# Altium PCB Example.PcbDoc
Units mil, origin at the board's own origin, x right, y up, seen from the top; angles counter-clockwise.
Board outline 7086.61 x 5787.4 mil, 2 copper layers (Top Layer, Bottom Layer); 73 components, 41 nets, 136 pads, 0 vias.
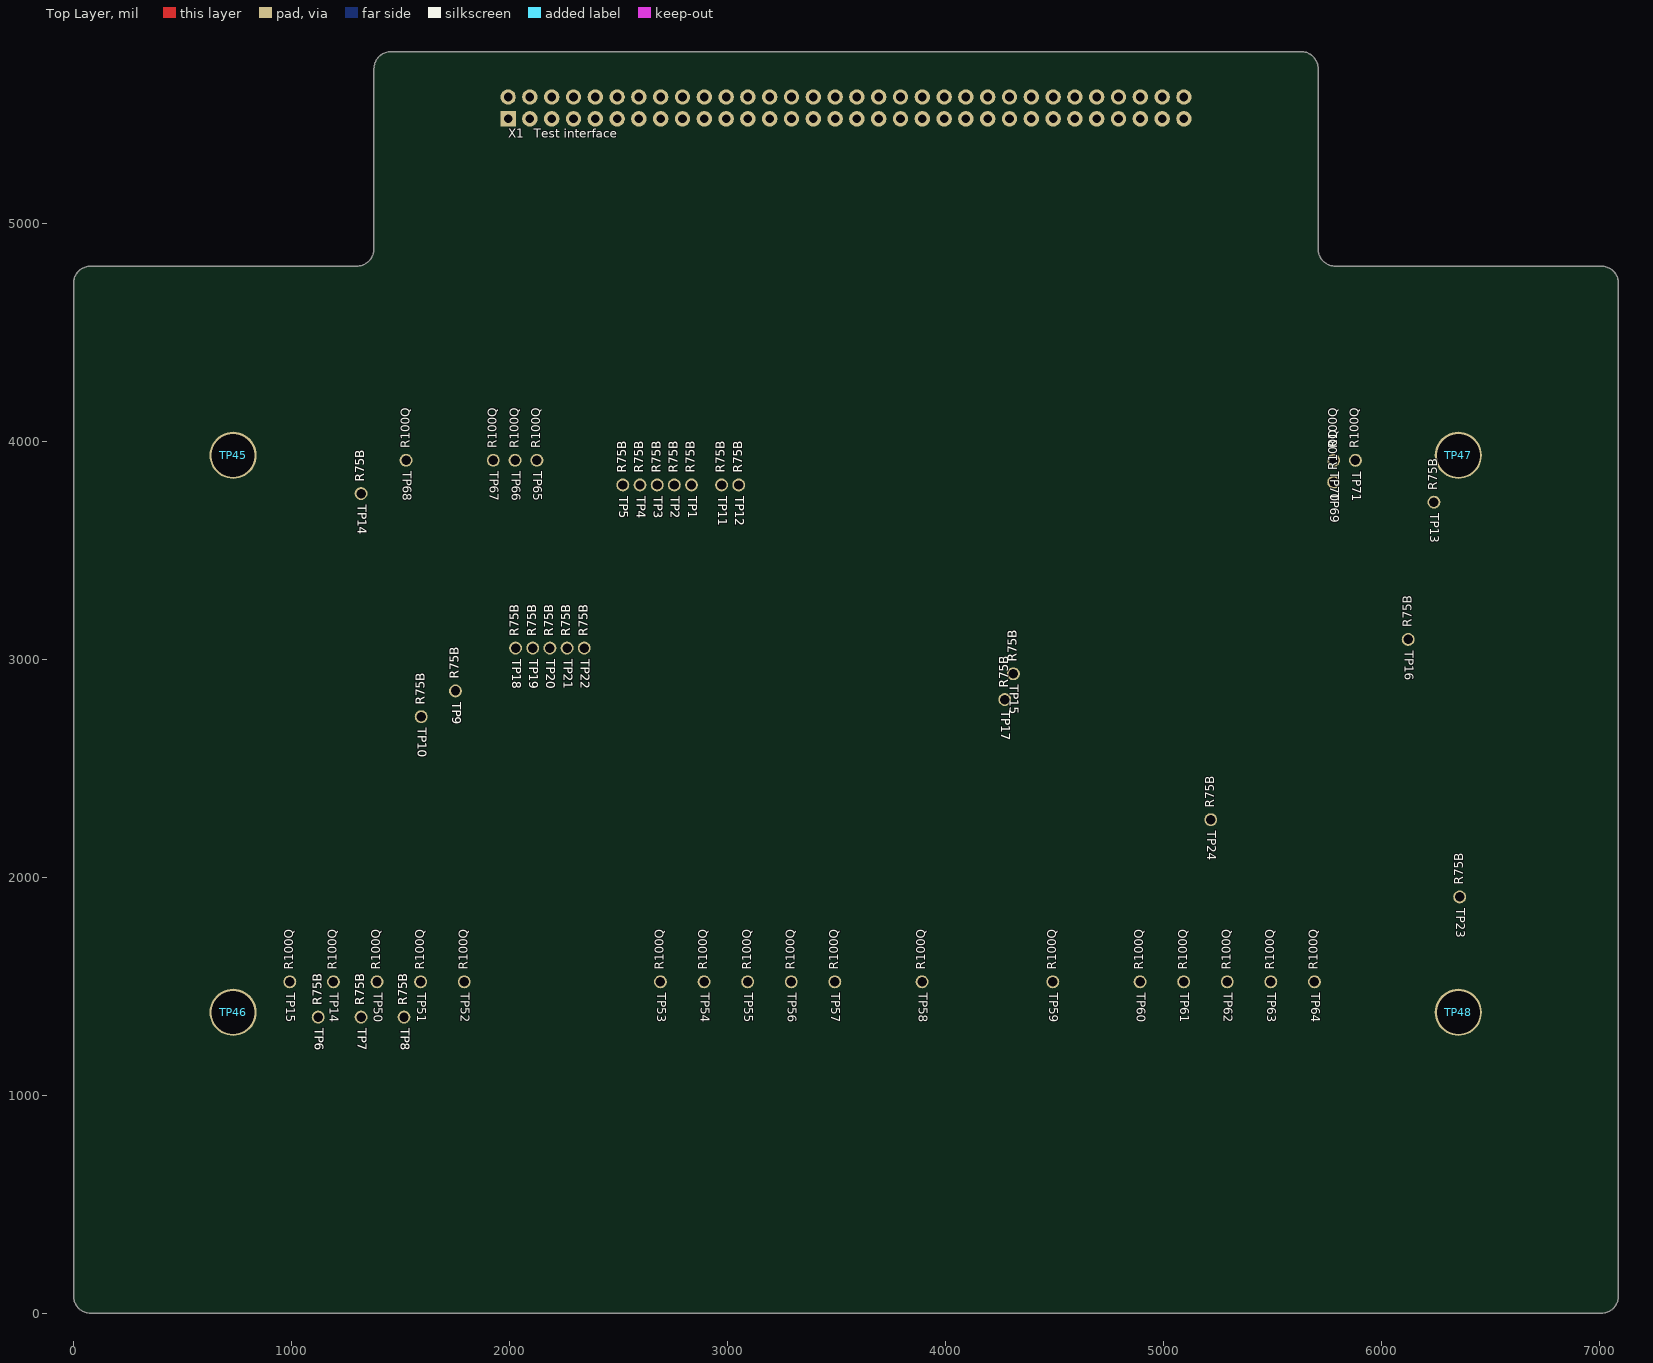
[diagram p0: Top Layer view]
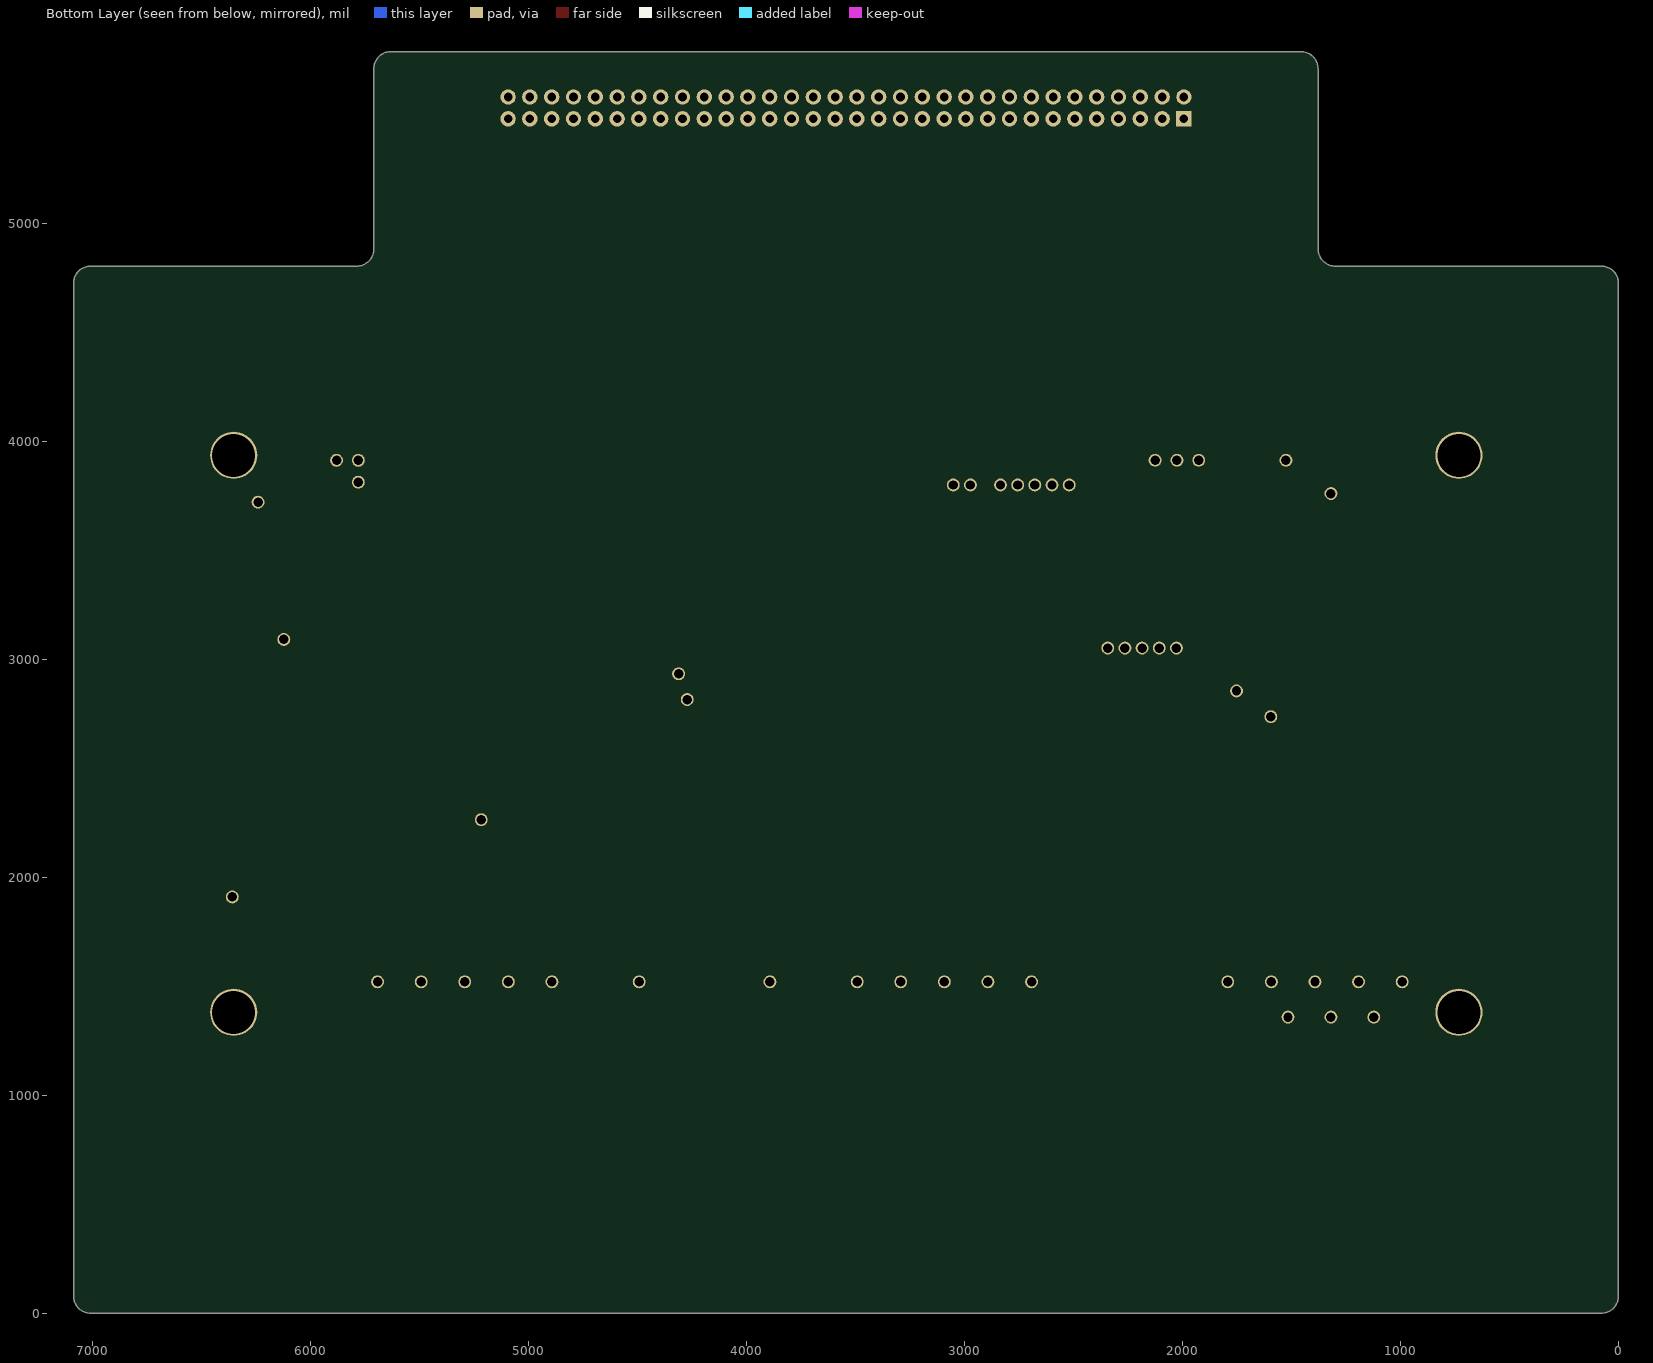
[diagram p1: Bottom Layer view, seen from below]

## Layer stack, top to bottom
Top Solder: solder mask 0.4, Solder Resist, Dk 3.5
Top Layer: signal copper 1.4
Dielectric 1: dielectric 12.6, FR-4, Dk 4.8
Bottom Layer: signal copper 1.4
Bottom Solder: solder mask 0.4, Solder Resist, Dk 3.5

## Board outline
78.74,0 cw(c78.74,78.74) 0,78.74 0,4724.41 cw(c78.74,4724.41) 78.74,4803.15 1299.21,4803.15 ccw(c1299.21,4881.89) 1377.95,4881.89 1377.95,5708.66 cw(c1456.69,5708.66) 1456.69,5787.4 5629.92,5787.4 cw(c5629.92,5708.66) 5708.66,5708.66 5708.66,4881.89 ccw(c5787.4,4881.89) 5787.4,4803.15 7007.87,4803.15 cw(c7007.87,4724.41) 7086.61,4724.41 7086.61,78.74 cw(c7007.87,78.74) 7007.87,0

## Design rules (kind name [scope] priority, off if disabled: settings)
Clearance [All] p1: gap=10 ignorepadtopadclearanceinfootprint=FALSE except(0: Arc-Hole Track-Hole SMDPad-Hole THPad-Hole Via-Hole Fill-Hole Poly-Hole Region-Hole Text-Hole)
PolygonConnect [All] p1: connectstyle=Relief reliefconductorwidth=10 reliefentries=4 polygonreliefangle="90 Angle" airgapwidth=10
RoutingVias [All] p1: holewidth=28 width=50 viastyle="Through Hole" minholewidth=28 minwidth=50 maxholewidth=28 maxwidth=50
SolderMaskExpansion [All] p1: expansion=4 istentingtop=FALSE
Width [All] p1: maxlimit=10 minlimit=10 preferedwidth=10
30 further rules are at their usual default settings.

## Components (designator, comment, footprint, x,y, rotation, side; value= is the part's Value field where it differs from the comment)
TP1 "R75B" ?#1 2834.65,3799.21 r0 top
TP1 "R75B" ?#1 2834.65,3799.21 r0 top
TP2 "R75B" ?#1 2755.91,3799.21 r0 top
TP2 "R75B" ?#1 2755.91,3799.21 r0 top
TP3 "R75B" ?#1 2677.17,3799.21 r0 top
TP3 "R75B" ?#1 2677.17,3799.21 r0 top
TP4 "R75B" ?#1 2598.43,3799.21 r0 top
TP4 "R75B" ?#1 2598.43,3799.21 r0 top
TP5 "R75B" ?#1 2519.68,3799.21 r0 top
TP5 "R75B" ?#1 2519.68,3799.21 r0 top
TP6 "R75B" ?#1 1122.05,1358.27 r0 top
TP6 "R75B" ?#1 1122.05,1358.27 r0 top
TP7 "R75B" ?#1 1318.9,1358.27 r0 top
TP7 "R75B" ?#1 1318.9,1358.27 r0 top
TP8 "R75B" ?#1 1515.75,1358.27 r0 top
TP8 "R75B" ?#1 1515.75,1358.27 r0 top
TP9 "R75B" ?#1 1751.97,2854.33 r0 top
TP9 "R75B" ?#1 1751.97,2854.33 r0 top
TP10 "R75B" ?#1 1594.49,2736.22 r0 top
TP10 "R75B" ?#1 1594.49,2736.22 r0 top
TP11 "R75B" ?#1 2972.44,3799.21 r0 top
TP11 "R75B" ?#1 2972.44,3799.21 r0 top
TP12 "R75B" ?#1 3051.18,3799.21 r0 top
TP12 "R75B" ?#1 3051.18,3799.21 r0 top
TP13 "R75B" ?#1 6240.16,3720.47 r0 top
TP14 "R100Q" ?#1 1192.13,1520.16 r0 top
TP14 "R75B" ?#1 1318.9,3759.84 r0 top
TP14 "R75B" ?#1 1318.9,3759.84 r0 top
TP15 "R100Q" ?#1 992.13,1520.16 r0 top
TP15 "R75B" ?#1 4311.02,2933.07 r0 top
TP15 "R75B" ?#1 4311.02,2933.07 r0 top
TP16 "R75B" ?#1 6122.05,3090.55 r0 top
TP17 "R75B" ?#1 4271.65,2814.96 r0 top
TP17 "R75E" ?#1 4271.65,2814.96 r0 top
TP18 "R75B" ?#1 2027.56,3051.18 r0 top
TP18 "R75B" ?#1 2027.56,3051.18 r0 top
TP19 "R75B" ?#1 2106.3,3051.18 r0 top
TP19 "R75B" ?#1 2106.3,3051.18 r0 top
TP20 "R75B" ?#1 2185.04,3051.18 r0 top
TP20 "R75B" ?#1 2185.04,3051.18 r0 top
TP21 "R75B" ?#1 2263.78,3051.18 r0 top
TP21 "R75B" ?#1 2263.78,3051.18 r0 top
TP22 "R75B" ?#1 2342.52,3051.18 r0 top
TP22 "R75B" ?#1 2342.52,3051.18 r0 top
TP23 "R75B" ?#1 6358.27,1909.45 r0 top
TP24 "R75B" ?#1 5216.54,2263.78 r0 top
TP45 "" ?#2 732.13,3935.15 r0 top
TP46 "" ?#2 732.13,1380.15 r0 top
TP47 "" ?#2 6352.13,3935.15 r0 top
TP48 "" ?#2 6352.13,1380.15 r0 top
TP50 "R100Q" ?#1 1392.13,1520.16 r0 top
TP51 "R100Q" ?#1 1592.13,1520.16 r0 top
TP52 "R100Q" ?#1 1792.13,1520.16 r0 top
TP53 "R100Q" ?#1 2692.13,1520.16 r0 top
TP54 "R100Q" ?#1 2892.13,1520.16 r0 top
TP55 "R100Q" ?#1 3092.13,1520.16 r0 top
TP56 "R100Q" ?#1 3292.13,1520.16 r0 top
TP57 "R100Q" ?#1 3492.13,1520.16 r0 top
TP58 "R100Q" ?#1 3892.13,1520.16 r0 top
TP59 "R100Q" ?#1 4492.13,1520.16 r0 top
TP60 "R100Q" ?#1 4892.13,1520.16 r0 top
TP61 "R100Q" ?#1 5092.13,1520.16 r0 top
TP62 "R100Q" ?#1 5292.13,1520.16 r0 top
TP63 "R100Q" ?#1 5492.13,1520.16 r0 top
TP64 "R100Q" ?#1 5692.13,1520.16 r0 top
TP65 "R100Q" ?#1 2125.39,3912.48 r0 top
TP66 "R100Q" ?#1 2025.39,3912.48 r0 top
TP67 "R100Q" ?#1 1925.39,3912.48 r0 top
TP68 "R100Q" ?#1 1525.39,3912.48 r0 top
TP69 "R100Q" ?#1 5780.12,3812.17 r0 top
TP70 "R100Q" ?#1 5780.12,3912.17 r0 top
TP71 "R100Q" ?#1 5880.12,3912.17 r0 top
X1 "Test interface" ?#3 1993.31,5478.74 r0 top

## Footprints (in the part's own frame and the unit in brackets; to place one, negate y for a bottom-side part, rotate by r counter-clockwise, add the part's x,y. Pads: shape width x height; smd on the part's side, far side on the other; paste and mask are expansions set on the pad)
?#1 [mm]
  round 1.5 hole 1.1 paste+0 mask+0.01: 1(0,0)
?#2 [mm]
  round 5.5 hole 5 paste+0 mask+0.01: 0(0,0)
?#3 [mm]
  rect 1.8x1.8 hole 1 paste+0 mask+0.01: 1(0,0)
  round 1.8 hole 1 paste+0 mask+0.01: 2(0,2.54) 3(2.54,0) 4(2.54,2.54) 5(5.08,0) 6(5.08,2.54) 7(7.62,0) 8(7.62,2.54) 9(10.16,0) 10(10.16,2.54) 11(12.7,0) 12(12.7,2.54) 13(15.24,0) 14(15.24,2.54) 15(17.78,0) 16(17.78,2.54) 17(20.32,0) 18(20.32,2.54) 19(22.86,0) 20(22.86,2.54) 21(25.4,0) 22(25.4,2.54) 23(27.94,0) 24(27.94,2.54) 25(30.48,0) 26(30.48,2.54) 27(33.02,0) 28(33.02,2.54) 29(35.56,0) 30(35.56,2.54) 31(38.1,0) 32(38.1,2.54) 33(40.64,0) 34(40.64,2.54) 35(43.18,0) 36(43.18,2.54) 37(45.72,0) 38(45.72,2.54) 39(48.26,0) 40(48.26,2.54) 41(50.8,0) 42(50.8,2.54) 43(53.34,0) 44(53.34,2.54) 45(55.88,0) 46(55.88,2.54) 47(58.42,0) 48(58.42,2.54) 49(60.96,0) 50(60.96,2.54) 51(63.5,0) 52(63.5,2.54) 53(66.04,0) 54(66.04,2.54) 55(68.58,0) 56(68.58,2.54) 57(71.12,0) 58(71.12,2.54) 59(73.66,0) 60(73.66,2.54) 61(76.2,0) 62(76.2,2.54) 63(78.74,0) 64(78.74,2.54)

## Nets (pads, with @x,y where several pads share a name; then routed paths per layer and width w, separated by ;. In a path a pad name is that pad's centre, name@x,y a point inside that pad or via, vN(x,y) a via of type N, cw(c..) or ccw(c..) an arc to the next point about the centre after c; other vN are vias at no path point)
15V: TP16.1
24V+: TP15.1@992.13,1520.16
24V-: TP14.1@1192.13,1520.16
24VIN: TP53.1
-MCLR: TP1.1
CAN1-GND: TP10.1 TP52.1
CAN1-H: TP50.1
CAN1-L: TP51.1
CAN1-VCC: TP9.1
CAN-RX2: TP66.1
CAN-TX2: TP67.1
CTS-IN: TP69.1
CUR1+: TP61.1
CUR1-: TP62.1
CUR2+: TP63.1
CUR2-: TP64.1
EX+: TP55.1
EX-: TP56.1
GND: TP3.1 TP12.1 TP15.1@4311.02,2933.07 TP20.1 TP54.1
Guide: TP45.0 TP46.0 TP47.0 TP48.0
IN1+: TP57.1
IN1-: TP58.1
IN2+: TP59.1
IN2-: TP60.1
NetDL1_K: TP6.1
NetDL2_K: TP7.1
NetDL3_K: TP8.1
NetR18_1: TP21.1
NetR24_1: TP18.1
NetTP22_1: TP22.1
PGC: TP5.1
PGD: TP4.1
RX: TP71.1
TX: TP70.1
TXE: TP68.1
VCC: TP14.1@1318.9,3759.84 TP65.1
VCC1: TP24.1
VCC2: TP23.1
VDD: TP2.1 TP11.1 TP19.1
VEE: TP17.1
VREF: TP13.1
pads on no net: X1.1 X1.2 X1.3 X1.4 X1.5 X1.6 X1.7 X1.8 X1.9 X1.10 X1.11 X1.12 X1.13 X1.14 X1.15 X1.16 X1.17 X1.18 X1.19 X1.20 X1.21 X1.22 X1.23 X1.24 X1.25 X1.26 X1.27 X1.28 X1.29 X1.30 X1.31 X1.32 X1.33 X1.34 X1.35 X1.36 X1.37 X1.38 X1.39 X1.40 X1.41 X1.42 X1.43 X1.44 X1.45 X1.46 X1.47 X1.48 X1.49 X1.50 X1.51 X1.52 X1.53 X1.54 X1.55 X1.56 X1.57 X1.58 X1.59 X1.60 X1.61 X1.62 X1.63 X1.64

## Silkscreen, mask and mechanical layers (free items; w line width, h text height)
Mechanical 1:
  the board outline again, w5.91